# Altium PCB PCB1.PcbDoc
Units mm, origin at the board's own origin, x right, y up, seen from the top; angles counter-clockwise.
Board outline 41.5 x 27.72 mm, 2 copper layers (Top Layer, Bottom Layer); 18 components, 11 nets, 47 pads, 38 vias.
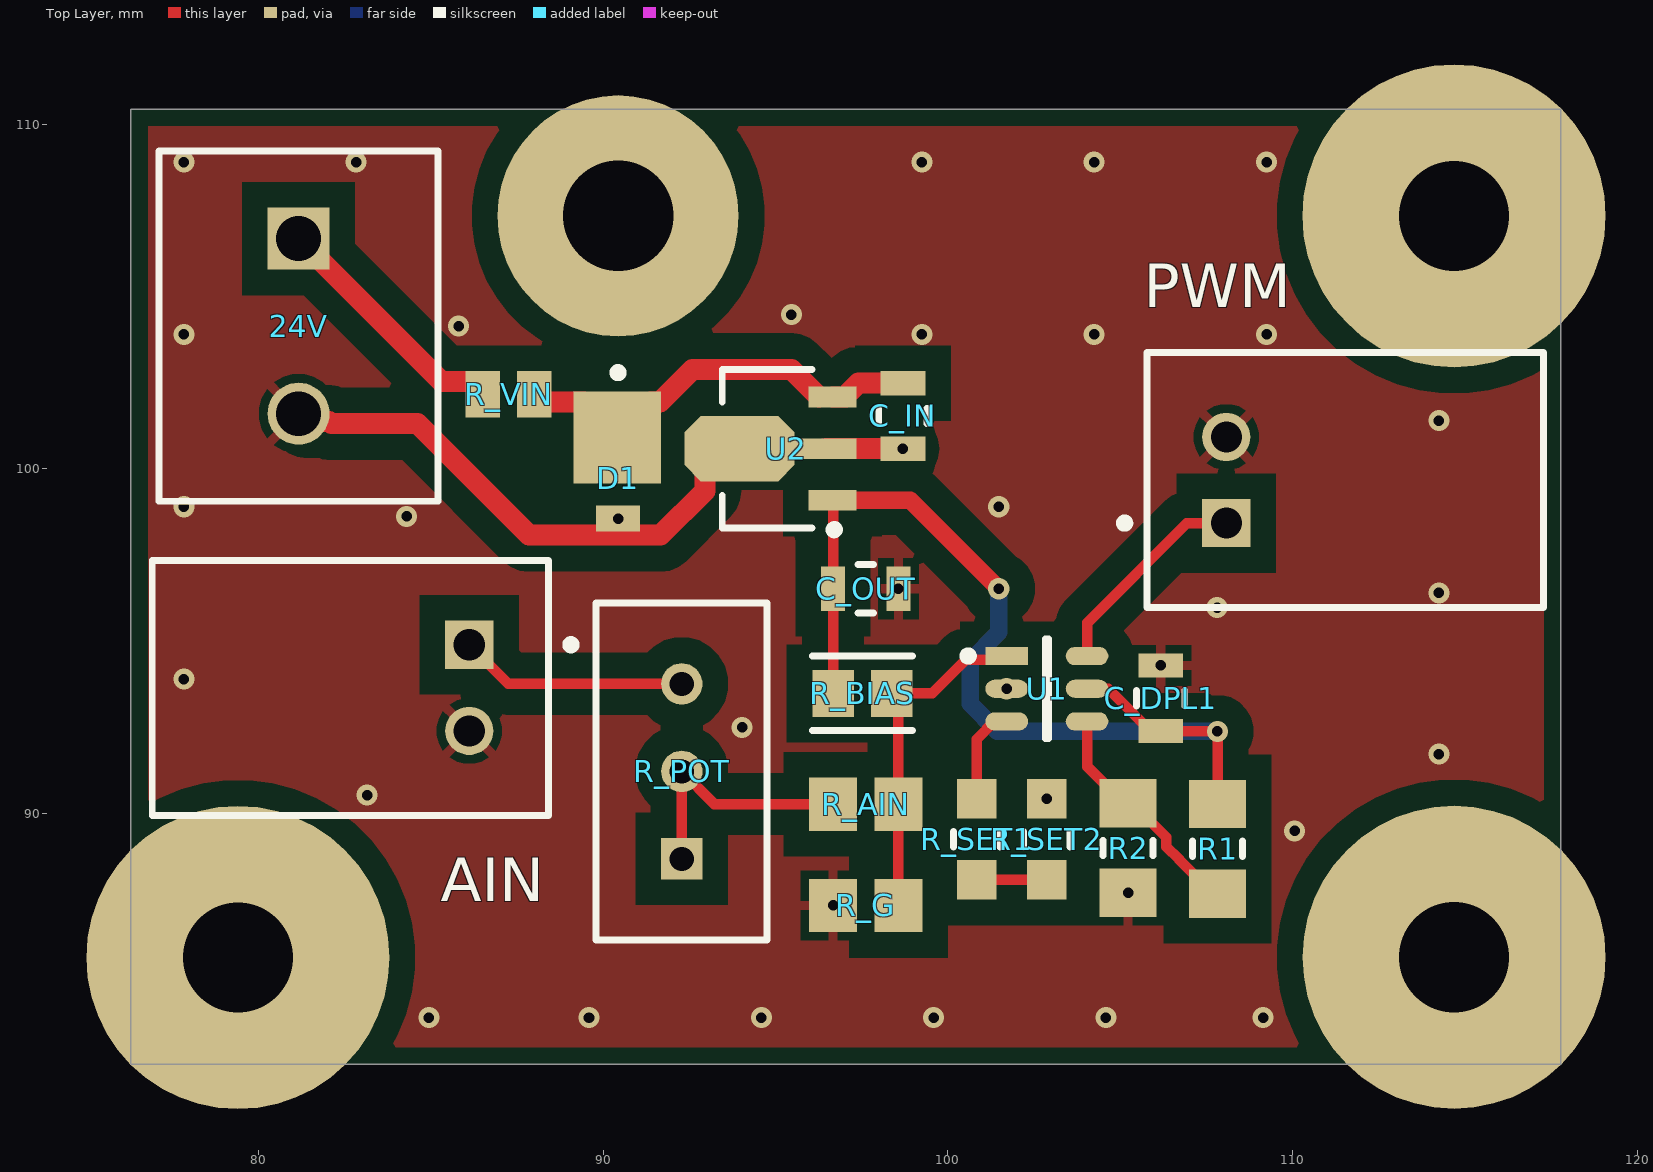
[diagram p0: Top Layer view]
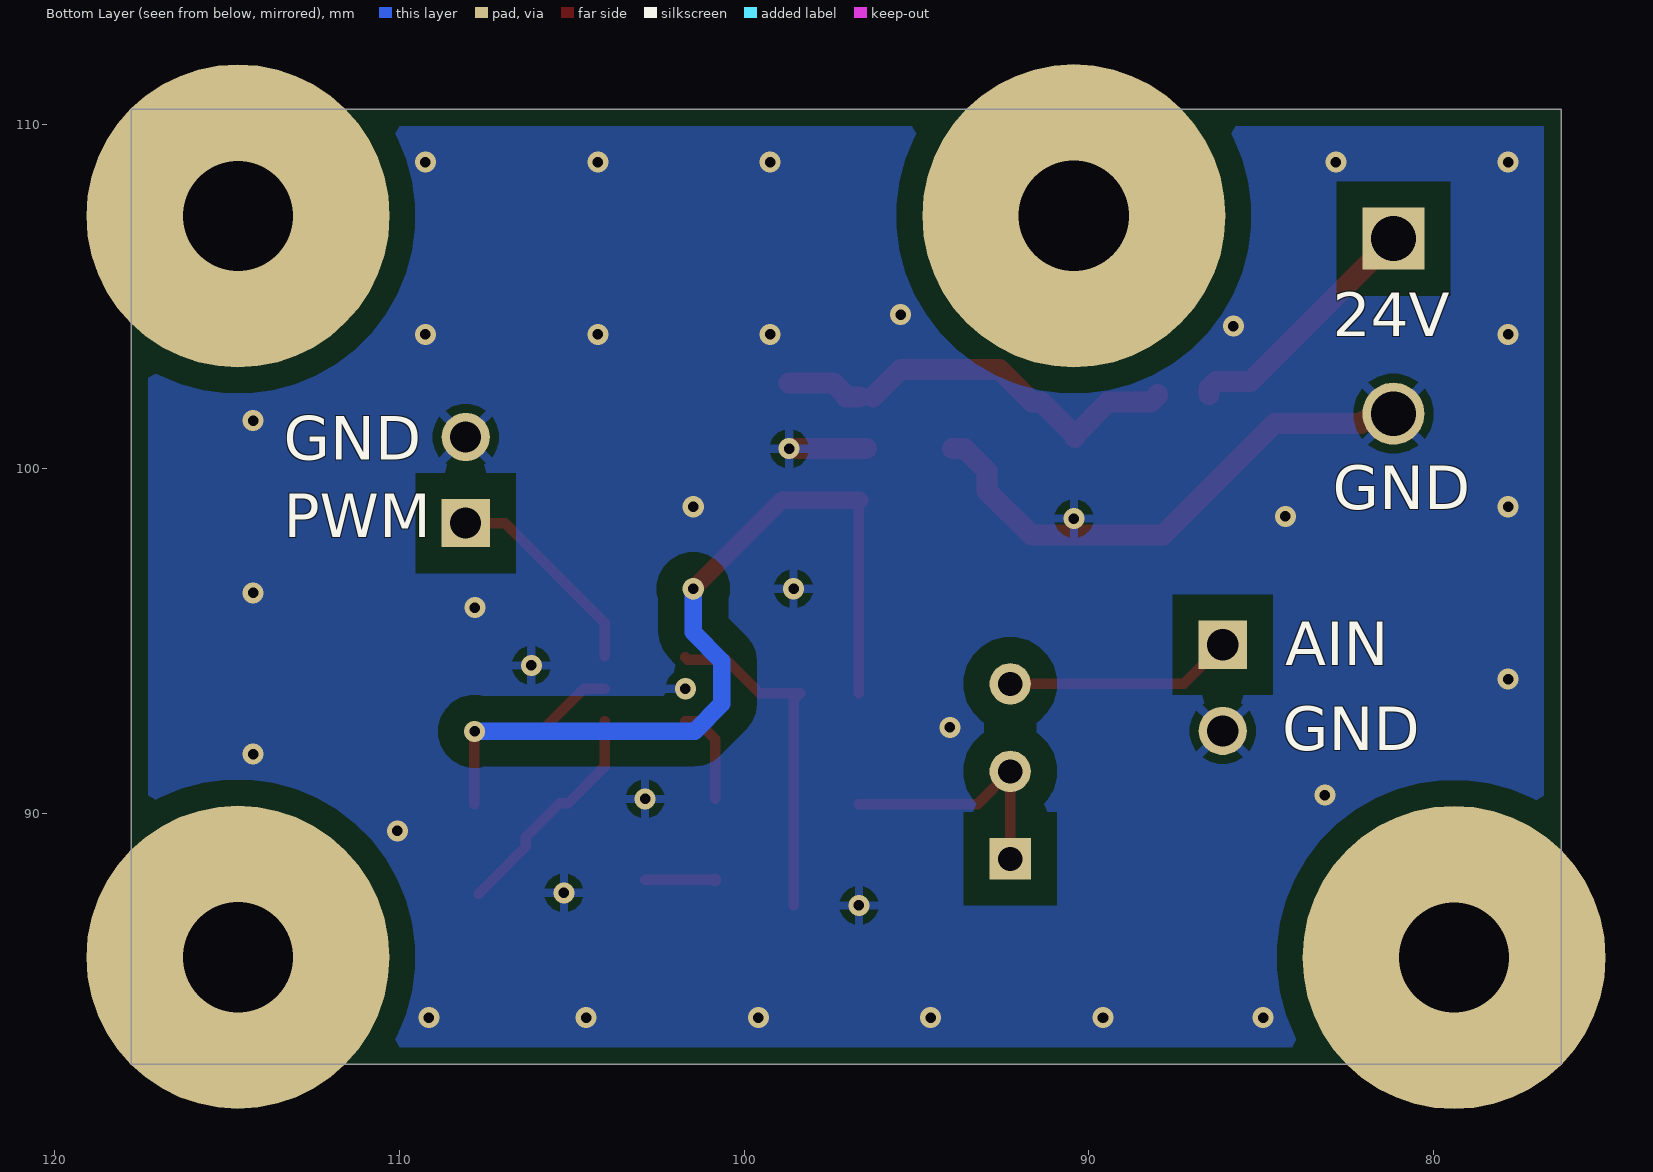
[diagram p1: Bottom Layer view, seen from below]
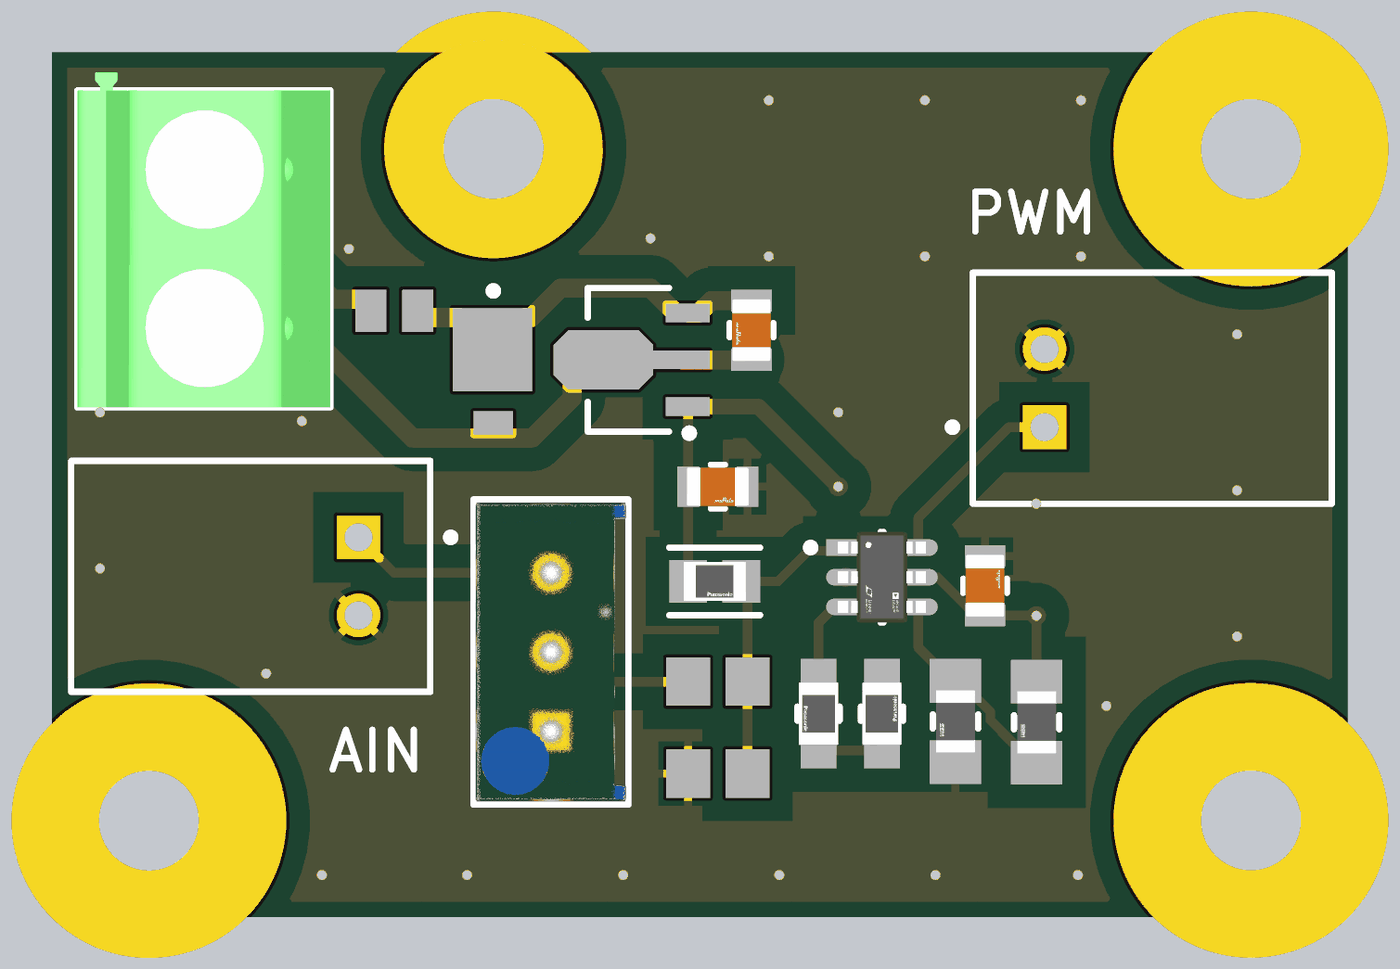
[diagram p2: 3D render of the assembled board from above, using the file's embedded part models]

## Layer stack, top to bottom
Top Solder: solder mask 0.0102, Solder Resist, Dk 3.5
Top Layer: signal copper 0.0356
Dielectric 1: dielectric 0.32, FR-4, Dk 4.8
Bottom Layer: signal copper 0.0356
Bottom Solder: solder mask 0.0102, Solder Resist, Dk 3.5

## Board outline
76.285,82.722 117.785,82.722 117.785,110.441 76.285,110.441

## Design rules (kind name [scope] priority, off if disabled: settings)
Clearance [All] p1: gap=0.75 ignorepadtopadclearanceinfootprint=FALSE
PlaneClearance [All] p1: clearance=1.5
PolygonConnect [All] p1: thpad.connectstyle=Relief thpad.reliefconductorwidth=0.254 thpad.reliefentries=4 thpad.polygonreliefangle="90 Angle" thpad.airgapwidth=0.254 thpad.conductorbypadedge=TRUE thpad.mindistance=0.381 thpad.enablemindistance=FALSE smdpad.connectstyle=Relief smdpad.reliefconductorwidth=0.254 smdpad.reliefentries=4 smdpad.polygonreliefangle="90 Angle" smdpad.airgapwidth=0.254 smdpad.conductorbypadedge=TRUE smdpad.mindistance=0.381 smdpad.enablemindistance=FALSE via.connectstyle=Direct via.reliefconductorwidth=0.254 via.reliefentries=4 via.polygonreliefangle="90 Angle" via.airgapwidth=0.254
RoutingVias [All] p1: holewidth=0.711 width=1.27 viastyle="Through Hole" minholewidth=0.305 minwidth=0.61 maxholewidth=0.711 maxwidth=1.27
SolderMaskExpansion [All] p1: expansion=0.102 istentingtop=FALSE
SupplyNets "Schematic Supply Nets" [InNet('GND')] p1: voltage=0.000
Width [All] p1: maxlimit=0.762 minlimit=0.127 preferedwidth=0.508 bottomlayer_minwidth=0.254 minimp=50.000000 maximp=50.000000 favimp=50.000000
29 further rules are at their usual default settings.

## Components (designator, comment, footprint, x,y, rotation, side; value= is the part's Value field where it differs from the comment)
24V "1729128" PHOE-1729128-2_V 81.153,104.14 r270 top (schematic designator J1)
AIN "Analog IN" JST-S2B-XH-A(LF)(SN)_V 86.107,93.645 r270 top (schematic designator P_AIN)
C_DPL1 "0.1μF" FP-GCM21B-0_15-MFG 106.172,93.345 r90 top
C_IN "0.33μF" FP-GCM219-0_15-MFG 98.691,101.534 r270 top
C_OUT "0.1μF" FP-GCM21B-0_15-MFG 97.614,96.52 r0 top
D1 "27V" ONSC-POWERMITE-2-457-04_D_V 90.424,99.572 r270 top
PWM "PWM OUT" JST-S2B-XH-A(LF)(SN)_V 108.077,99.675 r90 top (schematic designator P_OUT)
R1 "1MΩ" FP-RG2012-MFG 107.823,88.971 r270 top
R2 "28kΩ" FP-RG2012-MFG 105.226,88.996 r270 top
R_AIN "4.7kΩ" RESC2013X60X40ML20T25 97.614,90.271 r0 top
R_BIAS "100kΩ" FP-ERA6A-IPC_B 97.514,93.484 r0 top
R_G "2kΩ" RESC2013X60X40ML20T25 97.614,87.328 r0 top
R_POT "3296W-1-202LF" FP-3296W-MFG 92.269,91.221 r0 top
R_SET1 "150kΩ" FP-ERA6A-MFG 100.838,89.246 r270 top
R_SET2 "47KΩ" FP-ERA6A-MFG 102.87,89.246 r90 top
R_VIN "330Ω" RESC2013X60X40LL20T25 87.249,102.159 r0 top
U1 "LTC6992MPS6-1#TRMPBF" FP-S6-6-05-08-1636-IPC_B 102.87,93.618 r0 top
U2 "L78L05ABUTR" SOT-89_N 94.748,100.584 r180 top

## Footprints (in the part's own frame and the unit in brackets; to place one, negate y for a bottom-side part, rotate by r counter-clockwise, add the part's x,y. Pads: shape width x height; smd on the part's side, far side on the other; paste and mask are expansions set on the pad)
FP-3296W-MFG [mm]
  rect 1.2x1.2 hole 0.7 paste-2539.97 mask+0: 1(0.005,-2.54)
  round 1.2 hole 0.7 paste-2539.97 mask+0: 2(0.005,0) 3(0.005,2.54)
  silkscreen extent -2.48,-4.89 2.48,4.89, body extent -2.58,-4.99 2.58,4.99, height 0.25
FP-ERA6A-IPC_B [mm]
  rect 1.205x1.362 smd paste+0 mask+0: 1(-0.851,0) 2(0.851,0)
  silkscreen extent -1.45,-1.08 1.45,1.08, body extent -1.7,-0.93 1.7,0.93, height 0.25
FP-ERA6A-MFG [mm]
  rect 1.15x1.15 smd paste+0 mask+0: 1(-1.175,0) 2(1.175,0)
  silkscreen extent -0.22,-0.67 0.22,0.67, body extent -1.85,-0.77 1.85,0.77, height 0.25
FP-GCM21B-0_15-MFG [mm]
  rect 0.7x1.3 smd paste+0 mask+0: 1(-0.95,0) 2(0.95,0)
  silkscreen extent -0.22,-0.7 0.22,0.7, body extent -1.4,-0.8 1.4,0.8, height 0.25
FP-GCM219-0_15-MFG [mm]
  rect 0.7x1.3 smd paste+0 mask+0: 1(-0.95,0) 2(0.95,0)
  silkscreen extent -0.23,-0.7 0.22,0.7, body extent -1.4,-0.8 1.4,0.8, height 0.25
FP-RG2012-MFG [mm]
  rect 1.4x1.65 smd paste+0 mask+0: 1(-1.3,0) 2(1.3,0)
  silkscreen extent -0.23,-0.73 0.23,0.73, body extent -2.1,-0.92 2.1,0.92, height 0.25
FP-S6-6-05-08-1636-IPC_B [mm]
  rect 1.24x0.526 smd paste+0 mask+0: 1(-1.166,0.95)
  rrect100% 1.24x0.526 smd paste+0 mask+0: 2(-1.166,0) 3(-1.166,-0.95) 4(1.166,-0.95) 5(1.166,0) 6(1.166,0.95)
  silkscreen extent -2.41,-1.45 0.05,1.45, body extent -2.04,-1.7 2.04,1.7, height 0.25
JST-S2B-XH-A(LF)(SN)_V [mm] "Header, 2-Leads, Body 7.4x11.5mm, Pitch 2.5mm"
  rect 1.4x1.4 hole 0.9: 1(-1.25,0)
  round 1.4 hole 0.9: 2(1.25,0)
  silkscreen extent -3.7,-9.2 3.7,3.08, body extent -3.7,-9.2 3.7,2.3, height 6.1
ONSC-POWERMITE-2-457-04_D_V [mil] "POWERMITE, 2-Leads, Body 1.965x1.9mm"
  rect 105.12x100 smd: 1(-52.56,-1)
  rect 30x50 smd: 2(40,0)
  silkscreen extent -132,-5 -122,5, body extent -80,-37 -3,37, height 45
PHOE-1729128-2_V [mm] "Receptacle, 2-Leads, Body 8.1x10.16mm, Pitch 5.08mm"
  rect 1.8x1.8 hole 1.3: 1(-2.54,0)
  round 1.8 hole 1.3: 2(2.54,0)
  silkscreen extent -5.08,-4.05 5.08,4.05, body extent -5.65,-4.05 5.08,4.05, height 10.01
RESC2013X60X40LL20T25 [mm] "Chip Resistor, 2-Leads, Body 2.00x1.25mm, IPC High Density"
  rect 1x1.35 smd: 1(-0.75,0) 2(0.75,0)
  body extent -1.1,-0.72 1.1,0.72, height 0.6
RESC2013X60X40ML20T25 [mm] "Chip Resistor, 2-Leads, Body 2.00x1.25mm, IPC Low Density"
  rect 1.4x1.55 smd: 1(-0.95,0) 2(0.95,0)
  body extent -1.1,-0.72 1.1,0.72, height 0.6
SOT-89_N [mm] "SOT89, 3-Leads, Body 4.5x2.4 mm, Pitch 1.5mm, Lead Span 4.1mm, IPC Medium Density"
  rect 1.4x0.6 smd: 1(-1.9,1.5) 3(-1.9,-1.5)
  rect 1.8x0.6 smd: 2(-1.7,0)
  oct 3.2x1.9 smd: 2(0.8,0)
  silkscreen extent -2.08,-2.3 1.3,2.47, body extent -1.3,-2.3 1.3,2.3, height 1.6

## Part data
24V: library part CMP-2000-05815-1, "PCB Terminal Block, 13.5 A, 400 V, 2-Pin THD, RoHS, Bulk", Current Rating=13500mA, Manufacturer="Phoenix Contact", Package Description="2-Pin Through Hole Device, Body 8.1 x 10.16 mm, Pitch 5.08 mm", Package Reference=1729128-2, Package Version=03/2015, Voltage Rating=400V, Datasheet URL=https://datasheet.ciiva.com/16046/1729128-16046181.pdf, Datasheet Version=12/2013, Manufacturer URL=http://www.phoenixcontact.com/, Mounting Technology=ThroughHole, No. of Positions=2, No. of Rows=1, Orientation=Horizontal, Package URL=https://www.phoenixcontact.com/online/portal/pi/pxc/product_detail_page/!ut/p/b1/3VdJjqNKFDxLH8AFycySyWY2ozFsEPOMMQaDOX1XedGL_1Vdm5YXJleknhSKeBkvI6EA8ncAo3AYoDhBQGco6KN7VURTdemj9us_IEKEZo_YHiPAEWEFmDGOHMORkqKYCORBZxgL7ZoaZYcbFFUZ3fqxSY6GOuxydWUuHqz1ynmMFygu583Bob0Ewr6Sd_l-5m-kAueHiB0jpRwZwe58wwtkpxtMYd_LmGcDRU02dRNEyWt6Y2ti5pSyJ_reIkzIulrqApdnbT11V5jnCKbYNCvhEM1MCpPByat_X379-iThf08CI5GfOPqfBeS3BRoBOdD55AKVv0iLwCMq-2BrzXWSGRH7pUGD9uwXQjiph3xL0DKQwdGa0JImiIOmBNOestqgwTHSSs2oOep-78apyXQBvNi8ZLaFjvjWvcaUEBu0MC6Wbe-d6mB0FAebo2lUWinqYaZs5DAYzV0RP9yitUjnGJ0iI9xhZkT42OCQNUJJhkgWINNQLP2JFP6OpMg3JCVg70jqHT0lvKOnhHf0lPuOnnLf0VPuWx6_dxwUIvwk5WMkT0kLL1mh61l2yZVSzG3pYV_bqo-mj6uMKwKwdnnW8Jh5RTOJzMOA5c-eJDaZQw4mTMPH02PvS_ZAqNVjVTo2WyYLkwH_KU1mmmG5kjRhDqPXLwwVHvVOjCM60-fpXvTDfMGW1PVFVS1r4e4yVDk4ZdNbkUHvqPqQSeian4UD39fNKmachqdJ1NJbyk8rXT9mXTvPk3oE5meulKGgiruPJek-4I9hTT6G8ZLOyRSm2RRVbThERQad5OS28hdt4YW4vG0stgYYzsWsK4_7y6DZMjJSCqri1kyiZR5vD7pwIrNR7QwPHTcLTI5qT7eRlpHrdGiupYlqQDJ7zy_CND8fWWBoLRXxk1RVcXiBQwbTD4Xi7KL-FuO94t9xaqweXzH, Packing=Bulk, PartNumber=1729128, Pitch=5.08mm, RoHS=TRUE
AIN PWM: library part CMP-1755-00005-1, "Male Header, Pitch 2.5 mm, 1 x 2 Position, Height 6.1 mm, Tail Length 3.4 mm, -25 to 85 degC, RoHS, Bulk", Capacitance="1 nF", Case\Package=Radial, Max Operating Temperature="125 degC", Min Operating Temperature="-55 degC", Package Quantity=500, Tolerance=10%, Type (Capacitors)=X7R, Voltage Rating="100 V", ComponentLink1Description="Manufacturer URL", ComponentLink1URL=http://www.jst.com/home2.html, ComponentLink2Description=Datasheet, ComponentLink2URL=http://www.jst-mfg.com/product/pdf/eng/eXH.pdf, DatasheetVersion=May-16, Height="2.54 mm", Lead Pitch="2.54 mm", Length="5.33 mm", Mount="Through Hole", PackageDescription="Male Header, Pitch 2.5 mm, 1 x 2 Position, Height 6.1 mm, Tail Length 3.4 mm", PackageReference=S2B-XH-A(LF)(SN), Packaging=Bulk, Pins=2, Radiation Hardening=No, REACH SVHC="No SVHC", RoHSCompliant=true, Voltage Rating (DC)="100 V", Width="3.81 mm"
C_DPL1 C_OUT: library part CMP-2007-03364-2, "Ceramic Capacitor for Automotive 100nF ±10% 100VDC X7R 0805 Embossed T/R", Capacitance=100nF, Case Code (Imperial)=0805, Case Code (Metric)=2012, Dielectric=X7R, Max Operating Temperature=125°C, Min Operating Temperature=-55°C, Package Quantity=1, Ratings=AEC-Q200, Tolerance=10%, Voltage=100V, Case/Package=0805, Depth=1.25mm, Height=1.25mm, Lead Free="Lead Free", Length=2mm, Mount="Surface Mount", Packaging="Tape and Reel", Radiation Hardening=No, REACH SVHC="No SVHC", Termination=SMD/SMT, Thickness=0.055inch, Voltage Rating=100V, Voltage Rating (DC)=100V, Width=0.049inch
C_IN: library part CMP-2007-00092-2, "Ceramic Capacitor for Automotive 330nF  ±10% 50VDC X7R 0805 Paper T/R", Capacitance=330nF, Case Code (Imperial)=0805, Case Code (Metric)=2012, Dielectric=X7R, Max Operating Temperature=125°C, Min Operating Temperature=-55°C, Package Quantity=4000, Ratings=AEC-Q200, Tolerance=10%, Voltage Rating=50V, Case/Package=0805, Depth=1.25mm, Height=0.85mm, Lead Free="Lead Free", Length=2mm, Mount="Surface Mount", Packaging="Tape and Reel", Radiation Hardening=No, Termination=SMD/SMT, Thickness=0.037inch, Voltage Rating (DC)=50V, Width=0.049inch
D1: library part CMP-1060-00053-1, "3.2 W Plastic Surface Mount, 2-Pin POWERMITE, Pb-Free, Tape and Reel", Manufacturer="On Semiconductor", PartNumber=1PMT5935BT1G, ComponentLink1Description="Manufacturer URL", ComponentLink1URL=http://www.onsemi.com/, ComponentLink2Description=Datasheet, ComponentLink2URL=http://www.onsemi.com/pub_link/Collateral/1PMT5920B-D.PDF, ComponentLink3Description="Package Specification", ComponentLink3URL=http://www.onsemi.com/pub_link/Collateral/457-04.PDF, DatasheetVersion="Rev. 4", Mounting Technology="Surface Mount", PackageDescription="2-Pin POWERMITE, Body 1.965 x 1.9 mm", PackageReference=POWERMITE-2-457-04, PackageVersion="Rev. F, 05/2013", Packing="Tape and Reel", RoHS=Pb-Free, VZ Typ (V)=27
R1: library part CMP-2001-02713-2, "Automotive Metal Thin Film Chip Resistor, 0805, 1MΩ, 0.1%, 25ppm/°C, 0.125W, 150V", Case Code (Imperial)=0805, Case Code (Metric)=2012, Max Operating Temperature=155°C, Max Power Dissipation=125mW, Min Operating Temperature=-55°C, Package Quantity=5000, Power Rating=100mW, Resistance=1MR, Temperature Coefficient=25ppm/°C, Tolerance=0.1%, Voltage Rating=100V, Voltage Rating (DC)=150V, Case/Package=0805, Features="Automotive AEC-Q200", Height=0.4mm, Lead Free="Lead Free", Length=2mm, Number of Terminations=2, Packaging="Tape and Reel", RoHS Compliant=Yes, Series=RG, Termination=SMD/SMT, Width=1.25mm
R2: library part CMP-2001-02887-2, "Automotive Metal Thin Film Chip Resistor, 0805, 280kΩ, 0.1%, 25ppm/°C, 0.125W, 150V", Case Code (Imperial)=0805, Case Code (Metric)=2012, Max Operating Temperature=155°C, Max Power Dissipation=125mW, Min Operating Temperature=-55°C, Package Quantity=1, Resistance=280kR, Resistor Type="Thin Film", Temperature Coefficient=25ppm/°C, Tolerance=0.1%, Voltage Rating=150V, Case/Package=0805, Features="Automotive AEC-Q200", Height=0.02inch, Lead Free="Lead Free", Length=0.079inch, Number of Terminations=2, Packaging="Tape and Reel", Power Rating=125mW, RoHS Compliant=Yes, Series=RG, Termination=SMD/SMT, Voltage Rating (DC)=150V, Weight=0.000194oz, Width=0.049inch
R_AIN: library part CMP-2001-00644-1, Manufacturer=Panasonic, Part Number=ERA6AEB472V
R_BIAS: library part CMP-2001-00583-2, "RES 100K OHM 0.1% 1/8W 0805", Case Code (Imperial)=0805, Case Code (Metric)=2012, Max Operating Temperature=155°C, Max Power Dissipation=125mW, Min Operating Temperature=-55°C, Package Quantity=1, Resistance=100kR, Resistance Tolerance=0.1%, Resistor Type="Thin Film", Temperature Coefficient=25ppm/°C, Voltage Rating=100V, Case/Package=0805, Construction=Rectangular, Contact Plating=Tin, Depth=1.25mm, Features="Automotive AEC-Q200", Height=0.5mm, Lead Free="Lead Free", Length=2mm, Military Standard=Not, Mount="Surface Mount", Number of Pins=2, Number of Terminations=2, Packaging="Tape and Reel", Power Rating=125mW, Radiation Hardening=No, REACH SVHC="No SVHC", RoHS Compliant=Yes, Series=ERA-6A, Size Code=0805, Technology="METAL FILM", Termination=Solder, Tolerance=0.1%, Voltage Rating (DC)=100V, Width=1.25mm
R_G: library part CMP-2001-00609-1, Manufacturer=Panasonic, Part Number=ERA6AEB202V
R_POT: library part CMP-2000-05582-2, "TRIMMER 2K OHM 0.5W PC PIN TOP", Color=Blue, Max Operating Temperature=125°C, Max Power Dissipation=500mW, Min Operating Temperature=-55°C, Package Quantity=50, Resistance=2kR, Resistance Tolerance=10%, Resistor Type=Cermet, Temperature Coefficient=100ppm/°C, Contact Plating=Tin, Depth=4.83mm, Height=0.395inch, Lead Free="Lead Free", Length=9.53mm, Military Standard=Not, Mount=Panel, Number of Turns=25, Packaging=Rail/Tube, Power Rating=500mW, Radiation Hardening=No, REACH SVHC="No SVHC", RoHS Compliant=Yes, Series=3296, Taper=Linear, Technology=CERMET, Termination=Pin, Tolerance=10%, Weight=0.03oz, Width=9.53mm
R_SET1: library part CMP-2001-00599-2, "RES 150K OHM 0.1% 1/8W 0805", Case Code (Imperial)=0805, Case Code (Metric)=2012, Max Operating Temperature=155°C, Max Power Dissipation=125mW, Min Operating Temperature=-55°C, Package Quantity=5000, Resistance=150kR, Resistance Tolerance=0.1%, Resistor Type="Thin Film", Temperature Coefficient=25ppm/°C, Voltage Rating=100V, Case/Package=0805, Construction=Rectangular, Contact Plating=Tin, Depth=1.25mm, Height=0.5mm, Lead Free="Lead Free", Length=2mm, Military Standard=Not, Mount="Surface Mount", Number of Pins=2, Number of Terminations=2, Packaging="Tape and Reel", Power Rating=125mW, Radiation Hardening=No, REACH SVHC="No SVHC", RoHS Compliant=Yes, Series=ERA-6A, Technology="METAL FILM", Termination=SMD/SMT, Tolerance=0.1%, Voltage Rating (DC)=100V, Width=1.25mm
R_SET2: library part CMP-2001-00645-2, Case Code (Imperial)=0805, Case Code (Metric)=2012, Max Operating Temperature=155°C, Max Power Dissipation=125mW, Min Operating Temperature=-55°C, Resistance=47kΩ, Temperature Coefficient=25ppm/°C, Tolerance=0.1%, Voltage Rating=100V, Case/Package=0805, Composition="Metal Film, Thin Film", Contact Plating=Tin, Depth=1.25mm, Features="Automotive AEC-Q200", Height=500µm, Lead Free="Lead Free", Length=2mm, Lifecycle Status=Production, Military Standard=Not, Mount="Surface Mount", NexarPartId=1264112, Number of Pins=2, Number of Terminations=2, Packaging="Cut Tape", Power Rating=125mW, Radiation Hardening=No, REACH SVHC="No SVHC", RoHS=Compliant, Schedule B="8533210045, 8533210045", Termination=SMD/SMT, Voltage Rating (DC)=100V, Weight=5.499807mg, Width=1.25mm
R_VIN: library part CMP-2001-00628-1, Manufacturer=Panasonic, Part Number=ERA6AEB331V
U1: library part CMP-09075-000003-1, "IC OSC SILICON PROG TSOT23-6", Case/Package=SOT-23-6, Frequency=3.81Hz, Max Operating Temperature=125°C, Min Operating Temperature=-55°C, Operating Supply Current=365uA, Package Quantity=500, Mount="Surface Mount", Number of Pins=6, Packaging="Tape and Reel", RoHS Compliant=Yes, Series=TimerBlox®
U2: library part CMP-0244-00406-1, "Positive Voltage Regulator, 5V, 4-Pin SOT-89, Tape and Reel", ComponentLink1Description="Manufacturer URL", ComponentLink1URL=http://www.st.com, ComponentLink2Description=Datasheet, ComponentLink2URL=http://www.st.com/internet/com/TECHNICAL_RESOURCES/TECHNICAL_LITERATURE/DATASHEET/CD00000446.pdf, DatasheetVersion=1/02/2011, PackageDescription="3-Pin SOT-89 Package 1.5 mm Pitch, 4.1 mm Lead Span", PackageReference=SOT-89, PackageVersion=2011

## Free pads (board coordinates)
  round 8.8 / inner round 6.2 / far side round 8.8 hole 3.2: ""(79.394,85.819) ""(114.687,85.826)
  round 7 / inner round 6.2 / far side round 8.8 hole 3.2: ""(90.427,107.341)
  round 8.8 / inner round 0 / far side round 8.8 hole 3.2: ""(114.687,107.34)

## Via types
v1: diameter 0.61, hole 0.305, Top Layer to Bottom Layer, tented both sides, 38 vias

## Nets (pads, with @x,y where several pads share a name; then routed paths per layer and width w, separated by ;. In a path a pad name is that pad's centre, name@x,y a point inside that pad or via, vN(x,y) a via of type N, cw(c..) or ccw(c..) an arc to the next point about the centre after c; other vN are vias at no path point)
GND: 24V.2 AIN.2 C_DPL1.2 C_IN.2 C_OUT.2 D1.2 PWM.2 R2.2 R_G.1 R_SET2.2 U1.2 U2.2 | length 17.9
  Top Layer w0.61: 24V.2 81.381,101.372 82.042,101.372 82.105,101.309 84.601,101.309 87.836,98.075 91.663,98.075 92.949,99.361 92.949,99.939 93.595,100.584 U2.2@93.948,100.584 ; U2.2@96.448,100.584 v1(98.691,100.584)
  other v1: 84.934,84.074 89.582,84.074 94.582,84.074 99.582,84.074 104.582,84.074 109.146,84.074 96.664,87.328 105.226,87.696 110.058,89.496 102.87,90.421 83.146,90.533 114.244,91.721 94.026,92.498 101.704,93.618 77.826,93.9 106.172,94.295 107.81,95.975 114.244,96.4 98.564,96.52 90.424,98.556 84.29,98.621 77.826,98.9 101.473,98.9 114.244,101.4 77.826,103.9 99.244,103.9 104.244,103.9 109.244,103.9 85.798,104.139 95.458,104.474 77.826,108.9 82.826,108.9 99.244,108.9 104.244,108.9 109.244,108.9
Net24V_1: 24V.1 R_VIN.1 | length 7.3
  Top Layer w0.61: 24V.1 85.304,102.529 86.304,102.529 86.499,102.334 R_VIN.1
NetAIN_1: AIN.1 R_POT.3 | length 6.6
  Top Layer w0.305: AIN.1 87.241,93.761 R_POT.3
NetC_IN_1: C_IN.1 D1.1 R_VIN.2 U2.3 | length 12.2
  Top Layer w0.61: R_VIN.2 87.999,102.132 88.194,101.937 89.433,101.937 D1.1@90.399,100.972 ; D1.1 D1.1@90.399,100.972 ; U2.3@96.253,102.089 95.458,102.884 92.586,102.884 91.639,101.937 91.364,101.937 D1.1@90.399,100.972 ; U2.3 97.039,102.084 97.043,102.089 97.043,102.127 97.401,102.484 C_IN.1
NetPWM_1: PWM.1 U1.6 | length 6.2
  Top Layer w0.305: U1.6 104.036,95.527 106.934,98.425 PWM.1
NetR1_2: R1.2 R2.1 U1.4 | length 6.7
  Top Layer w0.305: U1.4 104.036,91.361 105.101,90.296 R2.1 105.351,90.296 106.34,89.307 106.34,89.038 106.709,88.668 106.709,88.66 R1.2@107.698,87.671
NetR_AIN_1: R_AIN.1 R_POT.1 R_POT.2 | length 7.3
  Top Layer w0.305: R_POT.1 R_POT.2 93.224,90.271 R_AIN.1
NetR_AIN_2: R_AIN.2 R_BIAS.2 R_G.2 U1.1 | length 10
  Top Layer w0.305: R_G.2 R_AIN.2 98.564,93.285 R_BIAS.2 99.539,93.484 100.52,94.465 101.632,94.465 U1.1@101.704,94.538
NetR_SET1_1: R_SET1.1 U1.3 | length 2.8
  Top Layer w0.305: R_SET1.1 100.838,92.158 101.348,92.668 U1.3
NetR_SET1_2: R_SET1.2 R_SET2.1 | length 2
  Top Layer w0.305: R_SET1.2 R_SET2.1
VDD: C_DPL1.1 C_OUT.1 R1.1 R_BIAS.1 U1.5 U2.1 | length 29.1
  Top Layer w0.305: R_BIAS.1 C_OUT.1 U2.1@96.664,99.069 ; U1.5 104.039,93.614 104.653,93.614 105.872,92.395 C_DPL1.1 106.179,92.388 v1@107.81,92.388 ; v1(107.817,92.382) 107.823,92.375 R1.1
  Top Layer w0.508: U2.1@96.642,99.084 U2.1 98.909,99.084 v1(101.473,96.52)
  Bottom Layer w0.508: v1(101.473,96.52) 101.473,95.251 100.64,94.418 100.64,93.177 101.435,92.382 v1(107.817,92.382)

## Polygon pours and split planes (outlines as drawn)
GND on Bottom Layer "GND_L02_P001" (solid, remove dead copper, pour order 1): 76.785,109.941 76.785,83.221 117.285,83.221 117.285,109.941
GND on Top Layer "GND_L01_P000" (solid, remove dead copper, pour order 0): 76.785,109.941 76.785,83.221 117.285,83.221 117.285,109.941

## Silkscreen, mask and mechanical layers (free items; w line width, h text height)
Bottom Overlay:
  text "24V" at 82.92,103.843 h1.27
  text "GND" at 113.361,100.264 h1.27
  text "GND" at 82.92,98.824 h1.27
  text "PWM" at 113.361,98.018 h1.27
  text "AIN" at 84.29,94.294 h1.27
  text "GND" at 84.38,91.834 h1.27
Top Designator:
  circle w0.013: c114.77,85.619 r1.6
  circle w0.013: c79.42,85.62 r1.6
  circle w0.013: c103.055,106.373 r1.6
  lines w0.013: 76.285,82.722 76.285,110.441 117.785,110.441 117.785,82.722 76.285,82.722
Mechanical 18:
  circle w0.013: c-5138.891,5263.048 r16
  circle w0.013: c5416.828,5263.052 r16
  circle w0.013: c-5256.046,-5438.633 r16
  lines w0.013: -5108.741,-5397.947 -5108.741,5234.072 5385.476,5234.072 5385.476,-5397.947 -5108.741,-5397.947